# Altium PCB PCB4.PcbDoc
Units mm, origin at the board's own origin, x right, y up, seen from the top; angles counter-clockwise.
Board outline 34.74 x 43.48 mm, 4 copper layers (Top Layer, GND, VCC, Bottom Layer), stack 0.778 mm thick; 52 components, 28 nets, 188 pads, 57 vias.
Unrouted connection lines stored in the file: 2.
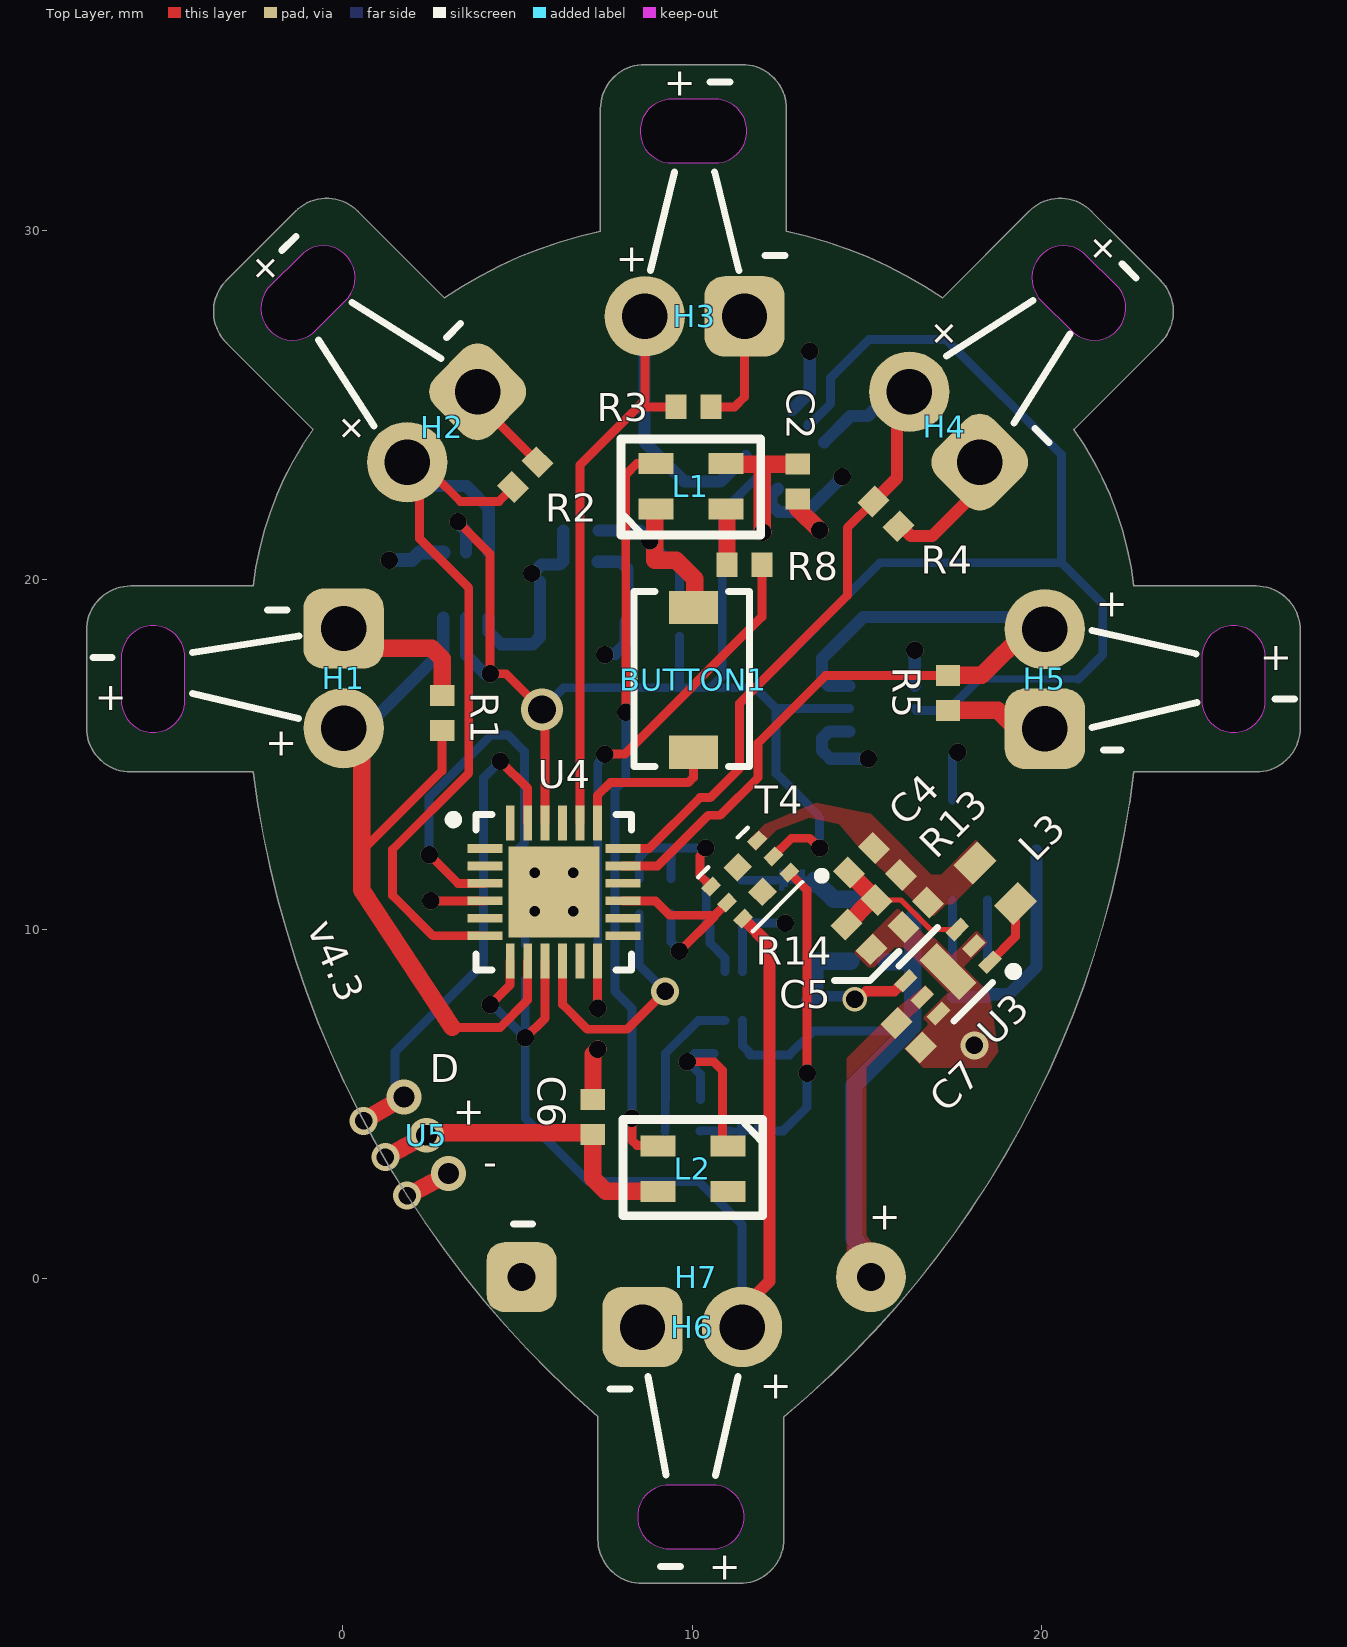
[diagram p0: Top Layer view]
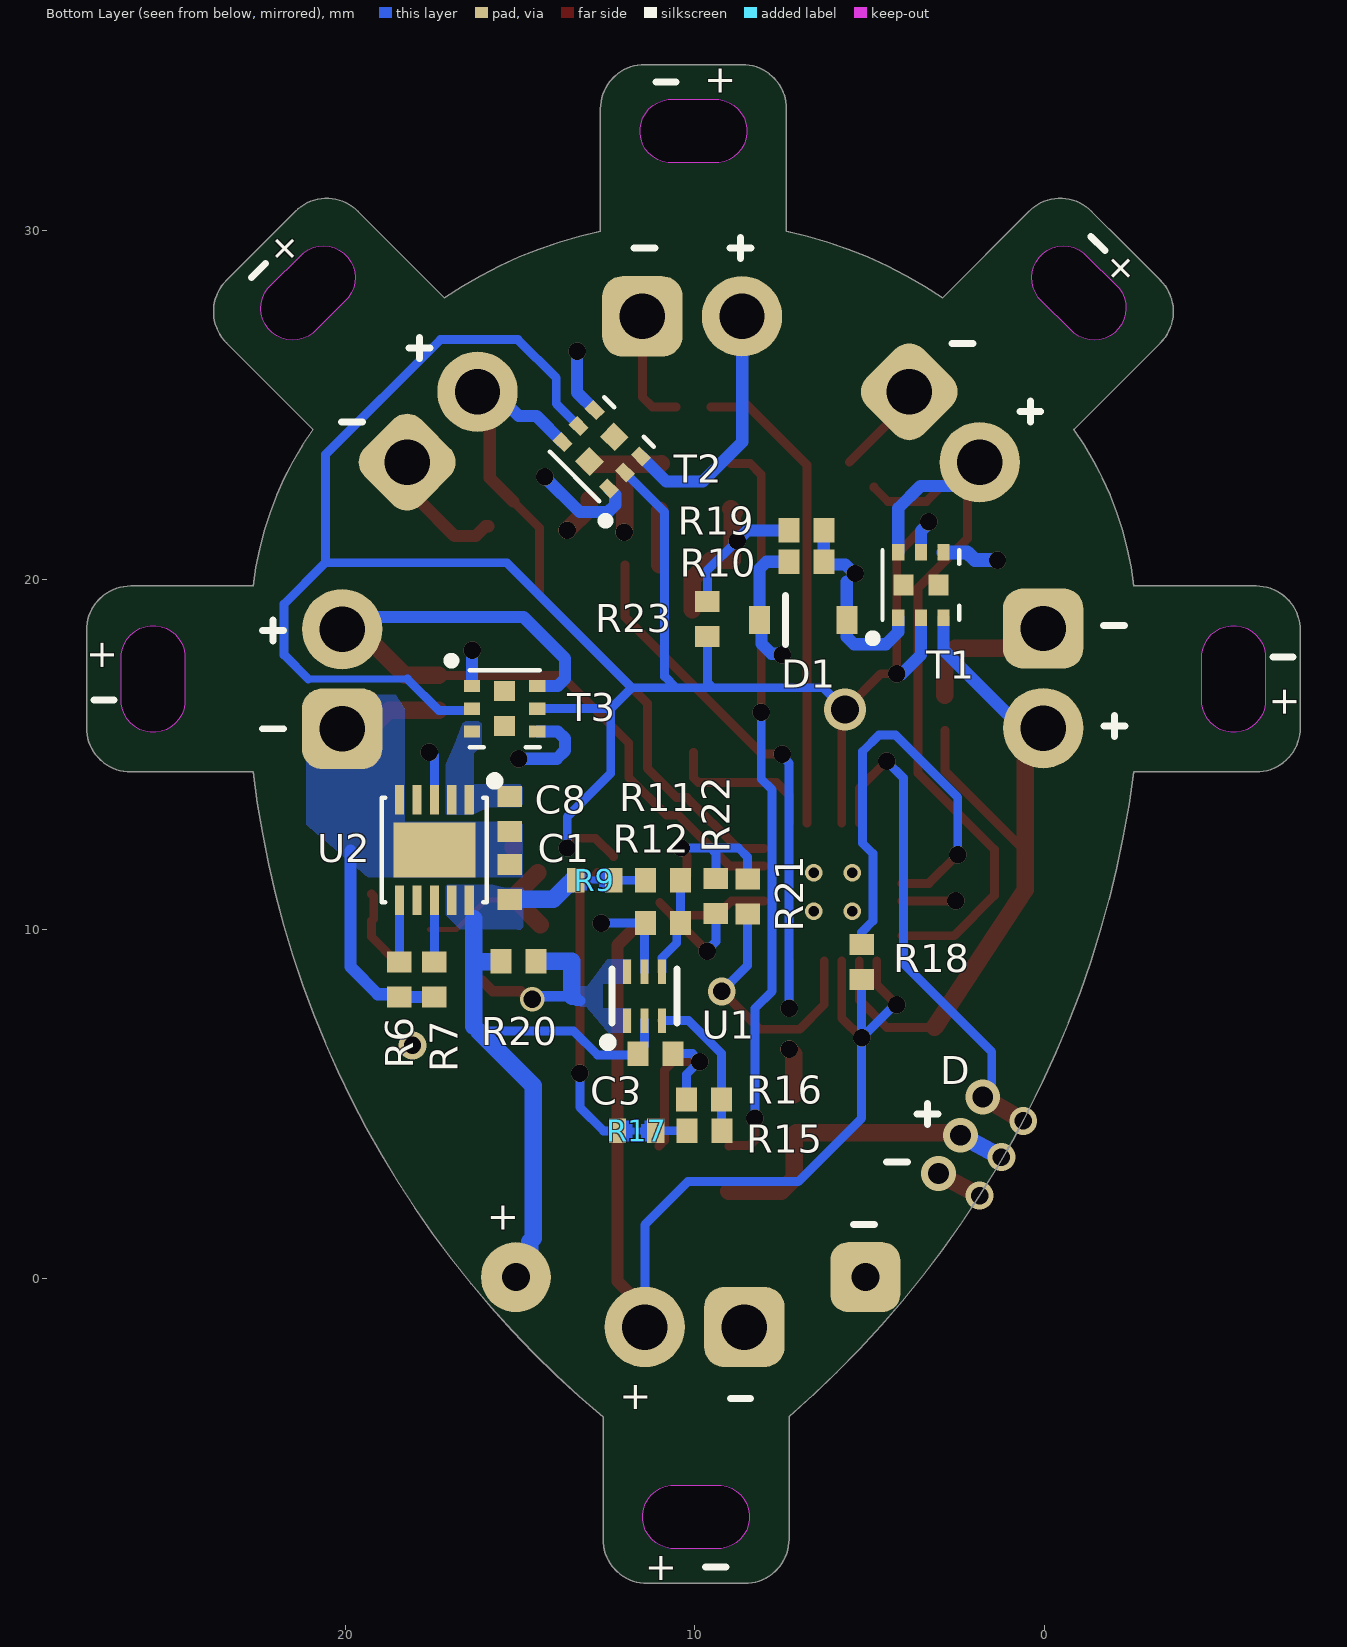
[diagram p1: Bottom Layer view, seen from below]
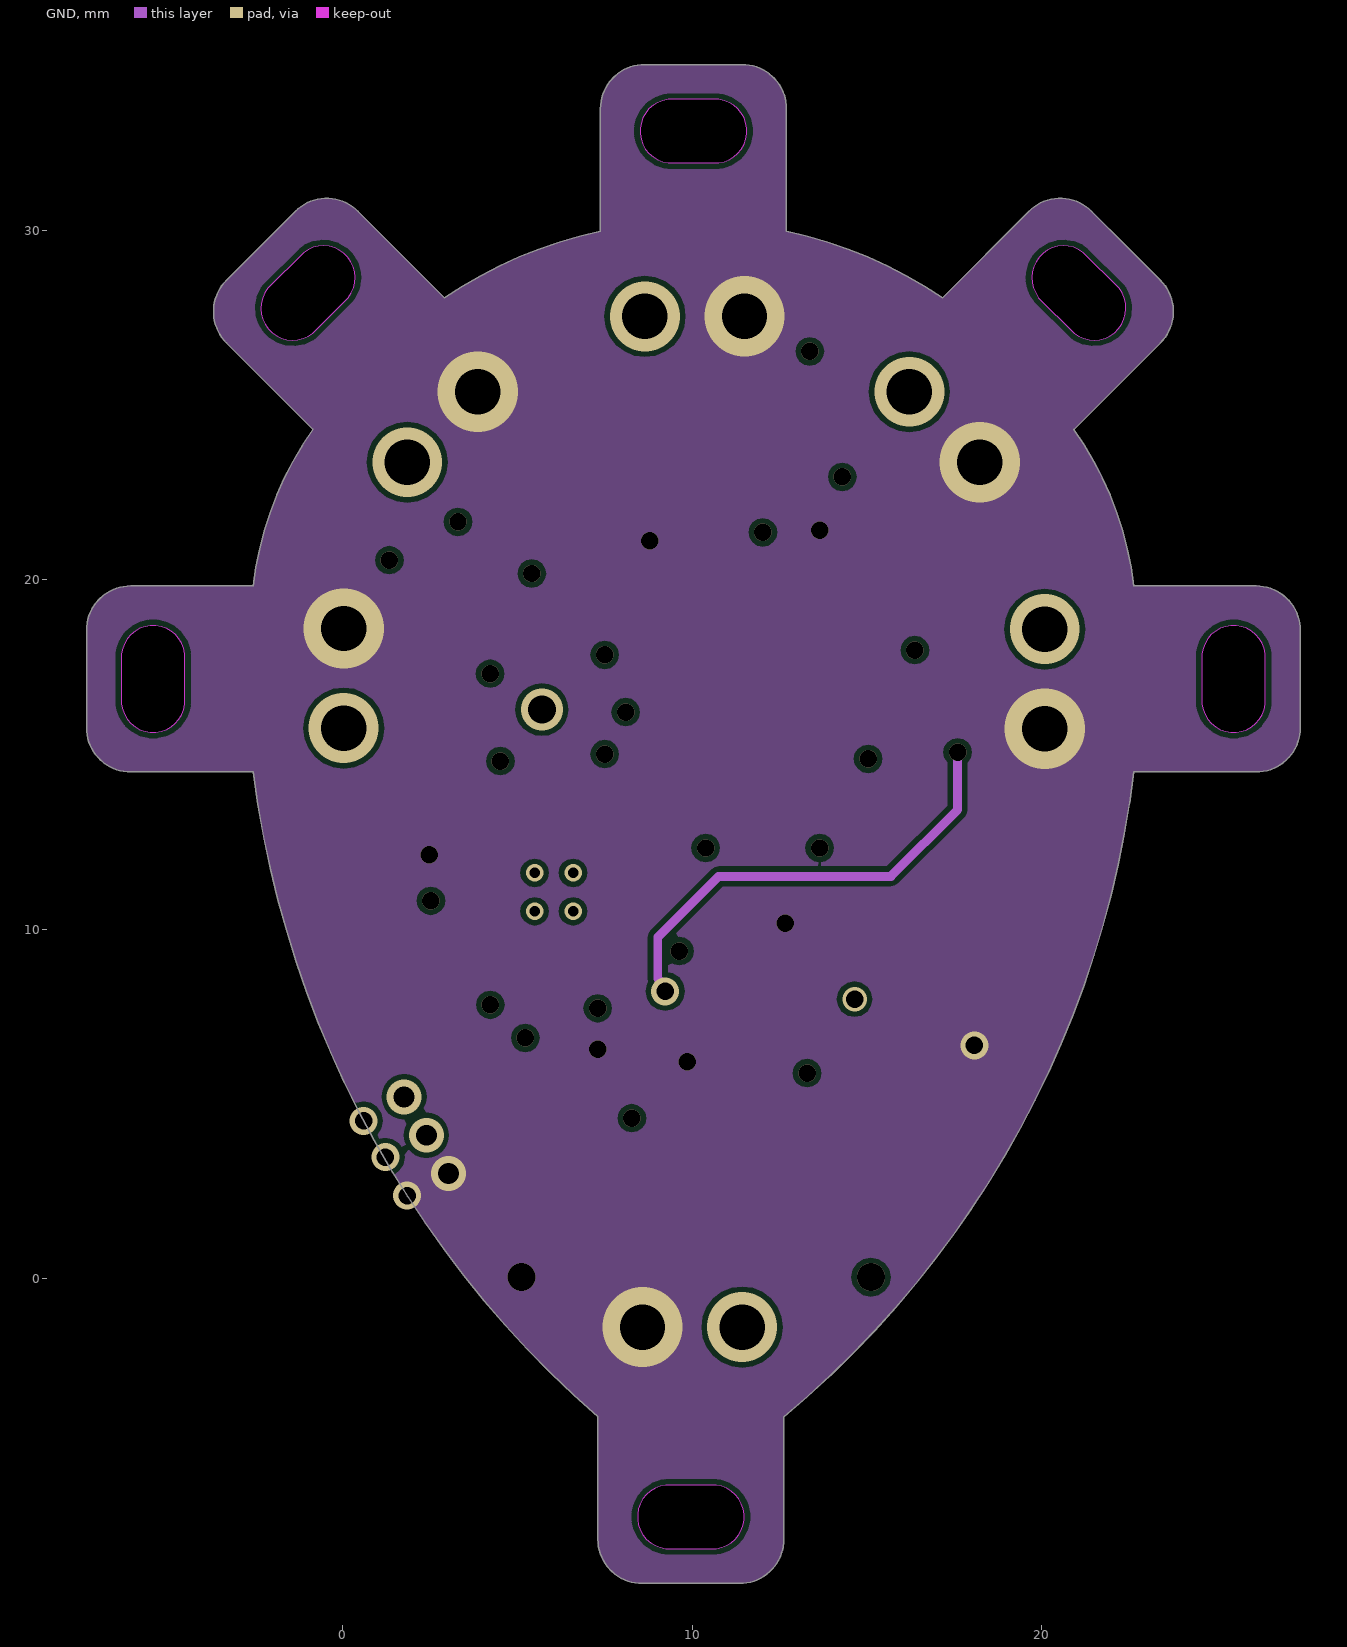
[diagram p2: GND]
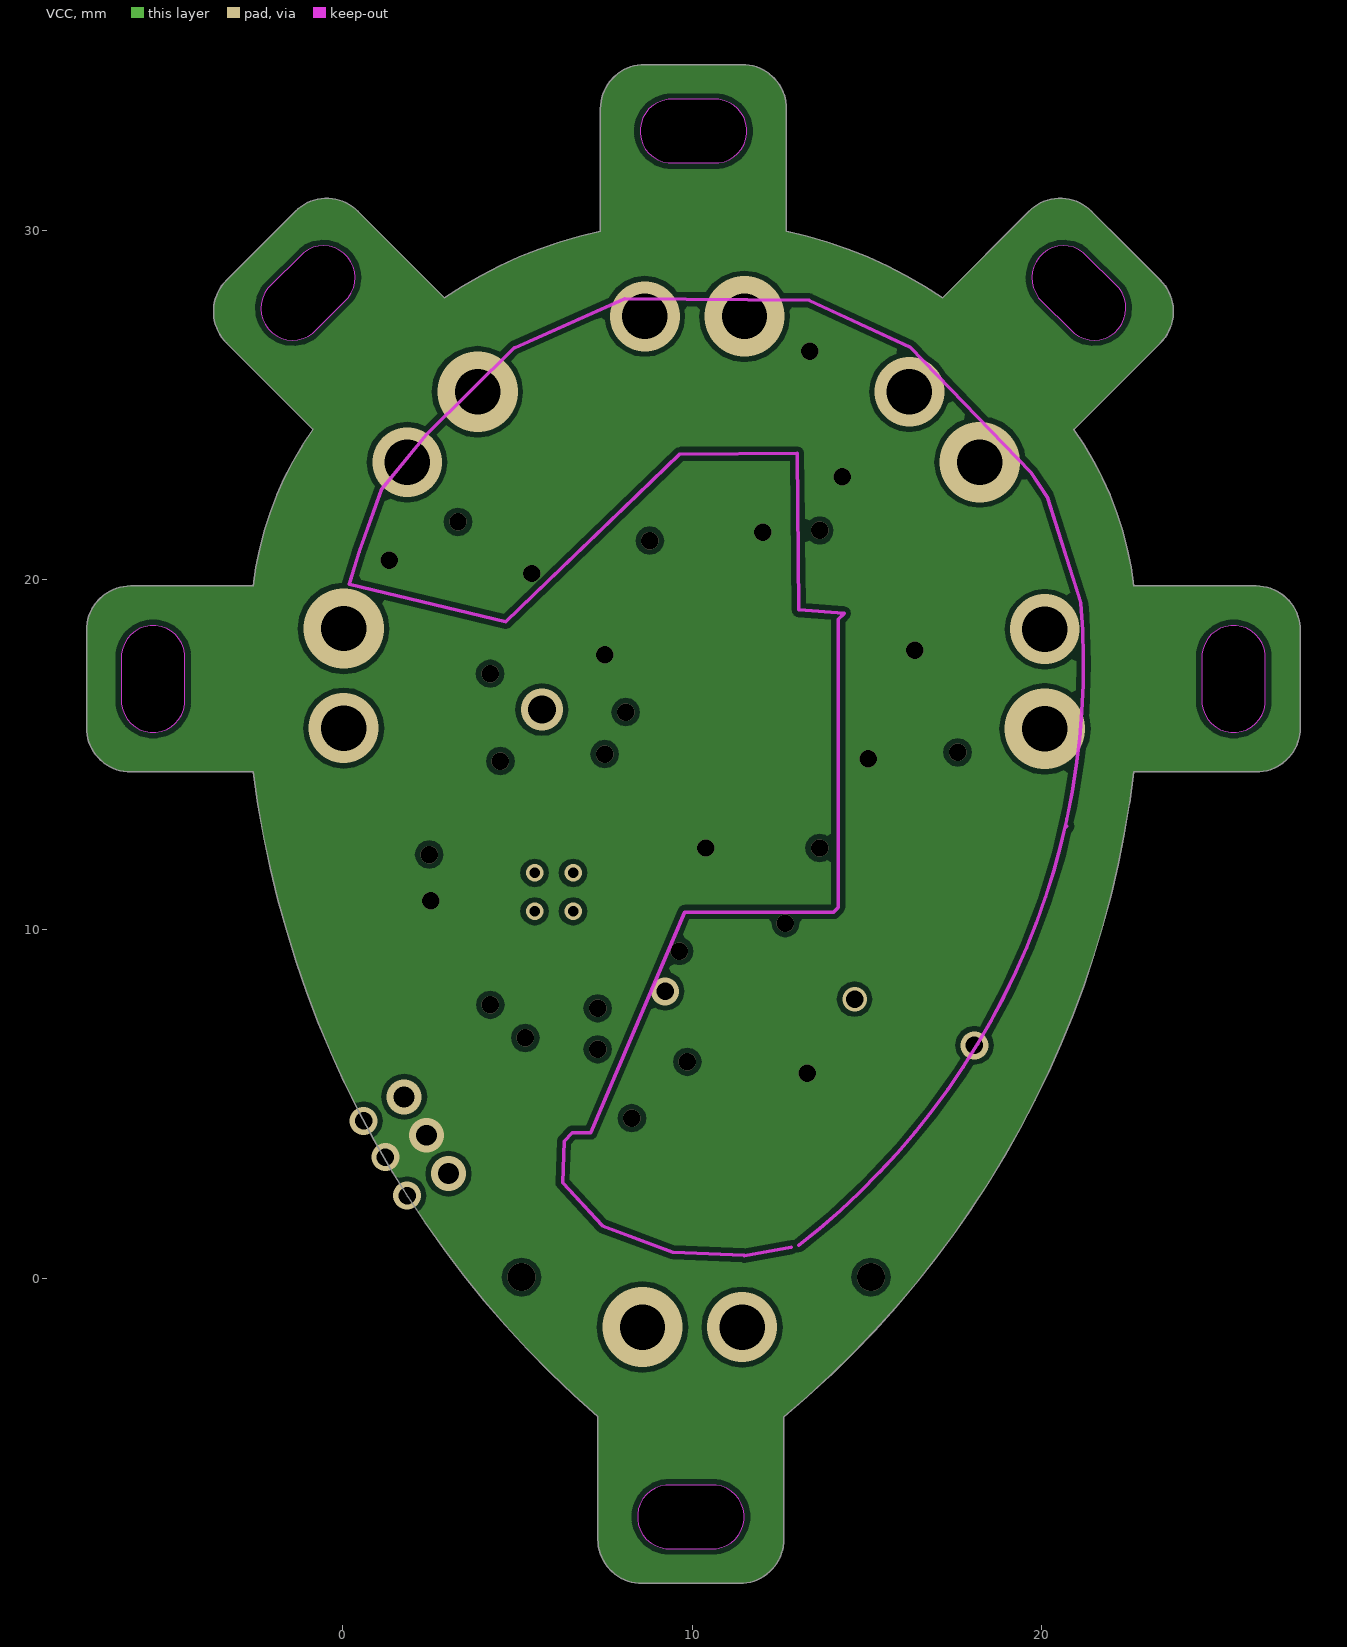
[diagram p3: VCC]
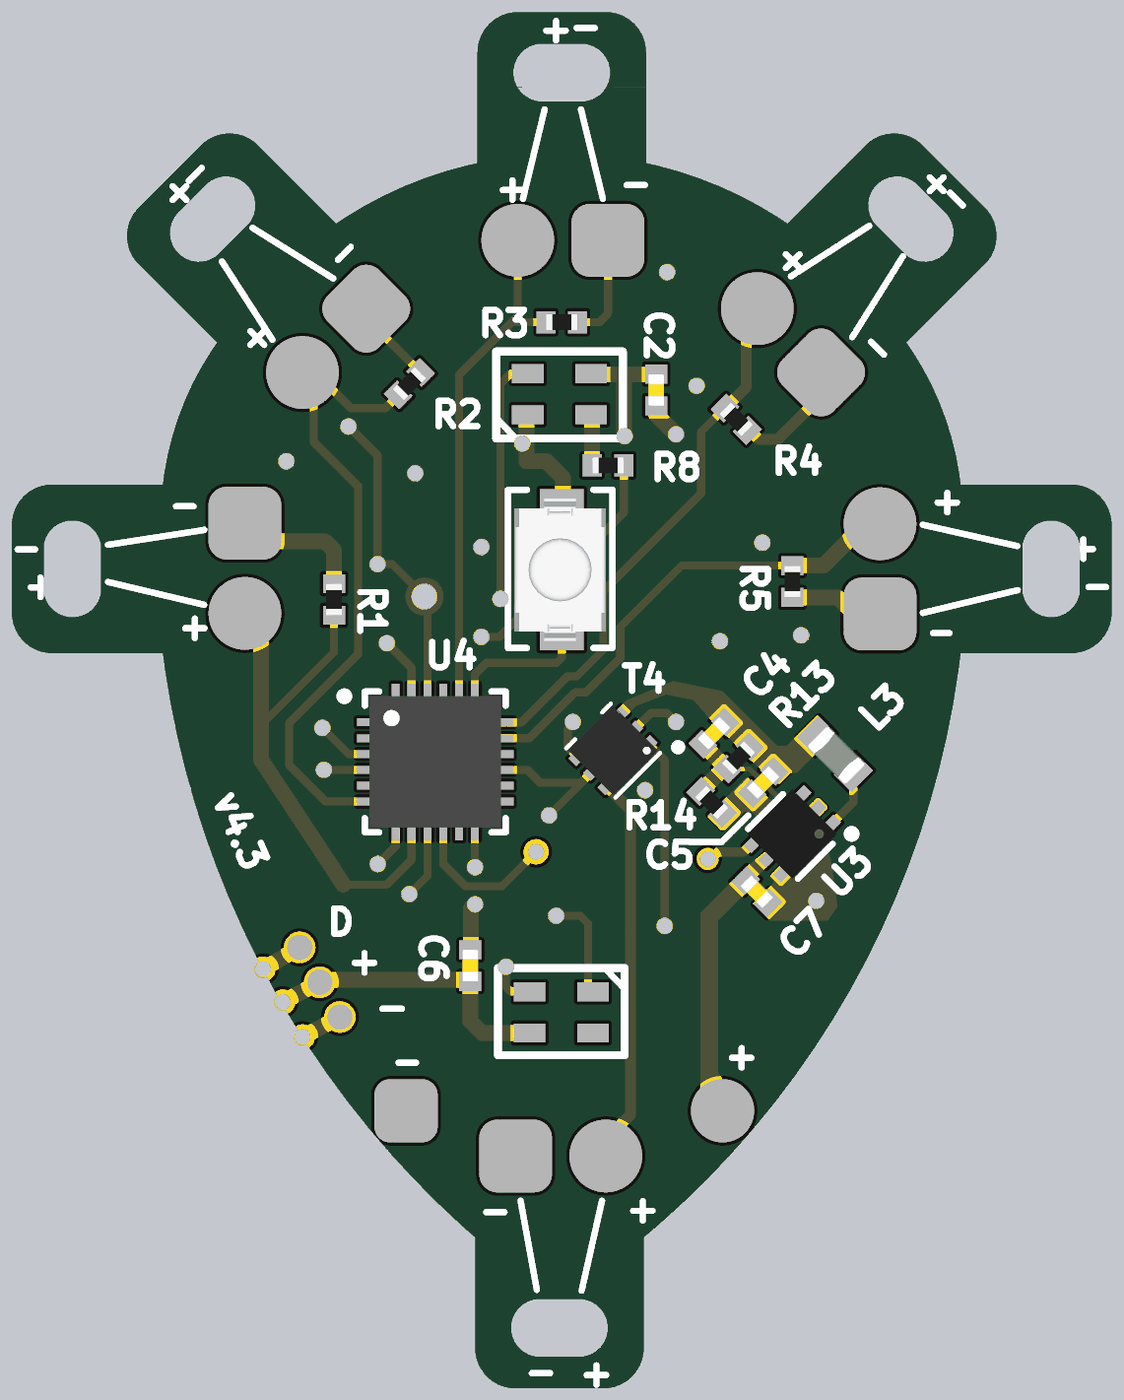
[diagram p4: 3D render of the assembled board from above, using the file's embedded part models]
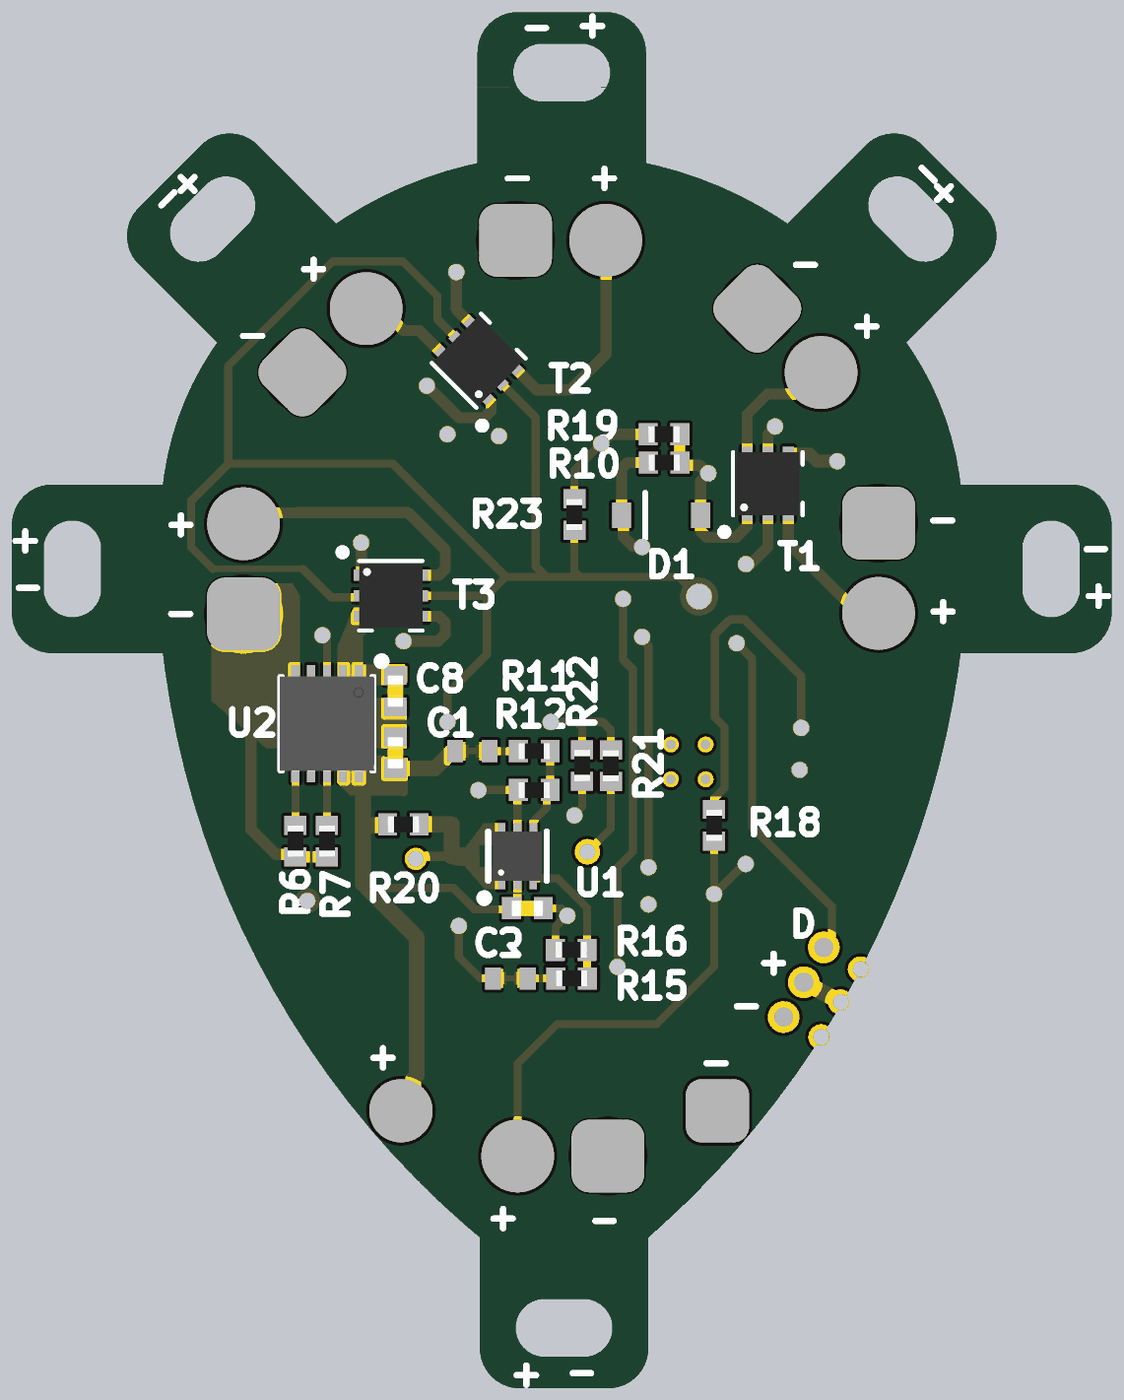
[diagram p5: 3D render of the assembled board from below, using the file's embedded part models]

## Layer stack, top to bottom
Top Solder: solder mask 0.0102, Solder Resist, Dk 3.5
Top Layer: signal copper 0.0356
Dielectric 1: core 0.254, FR-4, Dk 4.2
GND: signal copper 0.036
Dielectric 3: prepreg 0.127, Dk 4.2
VCC: signal copper 0.036
Dielectric 2: core 0.254, Dk 4.2
Bottom Layer: signal copper 0.0356
Bottom Solder: solder mask 0.0102, Solder Resist, Dk 3.5

## Board outline
-6.061,14.502 cw(c-6.061,15.772) -7.331,15.772 -7.331,17.163 -7.331,18.555 cw(c-6.061,18.555) -6.061,19.825 -2.561,19.825 cw(c7.106,18.7) -0.849,24.307 -3.324,26.782 cw(c-2.426,27.68) -3.324,28.578 -2.339,29.562 -1.355,30.546 cw(c-0.457,29.648) 0.441,30.546 2.916,28.071 cw(c10.009,17.658) 7.379,29.98 7.379,33.48 cw(c8.649,33.48) 8.649,34.75 11.432,34.75 cw(c11.432,33.48) 12.702,33.48 12.702,29.98 cw(c10.073,17.658) 17.166,28.071 19.641,30.546 cw(c20.539,29.648) 21.437,30.546 22.421,29.562 23.405,28.578 cw(c22.507,27.68) 23.405,26.782 20.93,24.307 cw(c12.976,18.7) 22.643,19.825 22.642,19.825 26.142,19.825 cw(c26.142,18.555) 27.412,18.555 27.412,17.163 27.412,15.772 cw(c26.142,15.772) 26.142,14.502 22.642,14.502 cw(c-5.579,17.866) 12.629,-3.956 12.629,-7.456 cw(c11.359,-7.456) 11.359,-8.726 9.967,-8.726 8.576,-8.726 cw(c8.576,-7.456) 7.306,-7.456 7.306,-3.956 cw(c26.693,18.273) -2.561,14.502
cut-out: 20.941,27.058 ccw(c21.506,27.778) 22.227,28.342 21.201,29.368 ccw(c20.637,28.647) 19.917,28.082
cut-out: 0.165,28.082 ccw(c-0.555,28.647) -1.119,29.368 -2.146,28.342 ccw(c-1.425,27.778) -0.859,27.058
cut-out: 10.691,-7.726 ccw(c10.582,-6.817) 10.693,-5.908 9.241,-5.908 ccw(c9.352,-6.817) 9.243,-7.726
cut-out: 26.412,17.887 ccw(c25.503,17.778) 24.595,17.889 24.595,16.437 ccw(c25.503,16.548) 26.412,16.44
cut-out: 9.317,33.75 ccw(c9.426,32.841) 9.315,31.933 10.767,31.933 ccw(c10.656,32.841) 10.765,33.75
cut-out: -6.331,16.44 ccw(c-5.422,16.548) -4.513,16.437 -4.513,17.889 ccw(c-5.422,17.778) -6.331,17.887
cut-out: 19.993,29.29
cut-out: -2.067,27.134
cut-out: 8.442,-6.818
cut-out: 25.504,15.639
cut-out: 11.566,32.842
cut-out: -5.423,18.688

## Design rules (kind name [scope] priority, off if disabled: settings)
Clearance "merge with traces" [InNamedPolygon('Bottom Layer-AX1')] p1: gap=0.15 ignorepadtopadclearanceinfootprint=TRUE
Clearance [All] p2: gap=0.15 ignorepadtopadclearanceinfootprint=FALSE
HoleSize [All] p1: absolutevalues=TRUE maxlimit=6 minlimit=0.2 maxpercent=80.000 minpercent=20.000
PolygonConnect [All] p1: connectstyle=Direct reliefconductorwidth=0.254 reliefentries=4 polygonreliefangle="90 Angle" airgapwidth=0.254
RoutingVias [All] p1: holewidth=0.711 width=1.27 viastyle="Through Hole" minholewidth=0.711 minwidth=1.27 maxholewidth=0.711 maxwidth=1.27
SolderMaskExpansion [All] p1: expansion=0.102 istentingtop=FALSE
Width [All] p1: maxlimit=1 minlimit=0.15 preferedwidth=0.5 minimp=50.000000 maximp=50.000000 favimp=50.000000
29 further rules are at their usual default settings.

## Components (designator, comment, footprint, x,y, rotation, side; value= is the part's Value field where it differs from the comment)
BUTTON1 "SWITCH_2PIN" "SWITCH- TL1015AF160QG" 10.041,17.138 r90 top
C1 "10uF 0402 Cap" "0402 CAP" 15.299,11.356 r270 bottom
C2 "10uF 0402 Cap" "0402 CAP" 13.027,22.813 r270 top
C3 "100nF 0402 Cap" "0402 CAP" 11.128,6.439 r180 bottom
C4 "33pF 0402" "0402 CAP" 14.851,11.972 r225 top
C5 "10uF 0402 Cap" "0402 CAP" 16.407,10.416 r225 top
C6 "10uF 0402 Cap" "0402 CAP" 7.152,4.63 r90 top
C7 "4.7uF 0402" "0402 CAP" 16.206,6.963 r315 top
C8 "10uF 0402 Cap" "0402 Cap" 15.3,13.301 r270 bottom
D1 "BAT60BE6327HTSA1" BAT60BE6327HTSA1 6.902,18.853 r0 bottom
H1 "Magnetci con. 2 pin" "MAGNETIC CON. 2 PIN" 0.029,15.757 r90 top
H2 "Magnetci con. 2 pin" "MAGNETIC CON. 2 PIN" 1.848,23.367 r45 top
H3 "Magnetci con. 2 pin" "MAGNETIC CON. 2 PIN" 8.652,27.542 r0 top
H4 "Magnetci con. 2 pin" "MAGNETIC CON. 2 PIN" 16.221,25.385 r315 top
H5 "Magnetci con. 2 pin" "MAGNETIC CON. 2 PIN" 20.097,18.588 r270 top
H6 "Magnetci con. 2 pin" "MAGNETIC CON. 2 PIN" 11.433,-1.386 r180 top
H7 "2 pin" 2_PIN 10.121,0.042 r0 top
L1 "LED_SK6805_2427" LED_SK6805_2427 10.969,22.031 r180 top
L2 "LED_SK6805_2427" LED_SK6805_2427 9.025,3.8 r0 top
L3 "2.2uH 0604" "0603 INDUCTOR" 18.677,11.313 r135 top
R1 "10K 0402" "0402 RES" 2.845,16.195 r90 top
R2 "10K 0402" "0402 RES" 5.227,23.014 r45 top
R3 "10K 0402" "0402 RES" 10.041,24.953 r0 top
R4 "10K 0402" "0402 RES" 15.552,21.888 r315 top
R5 "10K 0402" "0402 RES" 17.327,16.763 r270 top
R6 "10K 0402" "0402 RES" 18.458,8.563 r270 bottom
R7 "10K 0402" "0402 RES" 17.458,8.563 r270 bottom
R8 "1K 0402" "0402 RES" 11.502,20.431 r180 top
R9 "0402 Connected Pad" "0402 CONNECTED PAD" 12.865,11.404 r180 bottom
R10 "10K 0402" "0402 Res" 6.802,20.521 r0 bottom
R11 "2M 0402" "0402 RES" 10.909,11.404 r180 bottom
R12 "274K 0402" "0402 RES" 10.909,10.179 r180 bottom
R13 "820k 0402" "0402 RES" 15.629,11.194 r225 top
R14 "180k 0402" "0402 RES" 14.78,9.78 r315 top
R15 "2M 0402" "0402 RES" 9.728,4.226 r180 bottom
R16 "187K 0402" "0402 RES" 9.74,5.127 r0 bottom
R17 "0402 Connected Pad" "0402 CONNECTED PAD" 11.664,4.226 r0 bottom
R18 "10K 0402" "0402 RES" 5.227,9.063 r90 bottom
R19 "10K 0402" "0402 Res" 6.81,21.415 r0 bottom
R20 "2M 0402" "0402 Res" 15.043,9.09 r180 bottom
R21 "10K 0402" "0402 Res" 8.489,10.942 r90 bottom
R22 "2M 0402" "0402 Res" 9.4,10.951 r270 bottom
R23 "10K 0402" "0402 Res" 9.641,18.879 r90 bottom
T1 "NTLUD3A50PZTAG" NTLUD3A50PZTAG 3.53,19.853 r90 bottom
T2 "NTLUD3A50PZTAG" NTLUD3A50PZTAG 12.664,23.739 r45 bottom
T3 "NTLUD3A50PZTAG" NTLUD3A50PZTAG 15.443,16.313 r180 bottom
T4 "NTLUD3A50PZTAG" NTLUD3A50PZTAG 11.666,11.423 r225 top
U1 "TPS3700DSER" TPS3700DSER 11.44,8.087 r90 bottom
U2 "MCP73833T-AMI/MF" MCP73833T-AMI/MF 17.458,12.269 r270 bottom
U3 "TPS62240DRVTG4" TPS62240DRVR 17.326,8.79 r225 top
U4 "ATTINY1617-MN" ATTINY1617_QFN50P400X400X90_HS-25M 6.045,11.063 r0 top
U5 "1.27mm 3pin header" "1.27MM 3PIN HEADER" 1.76,5.204 r300 top

## Footprints (in the part's own frame and the unit in brackets; to place one, negate y for a bottom-side part, rotate by r counter-clockwise, add the part's x,y. Pads: shape width x height; smd on the part's side, far side on the other; paste and mask are expansions set on the pad)
"1.27MM 3PIN HEADER" [mm]
  round 0.8 smd: 1(0,0) 2(1.27,0) 3(2.54,0)
2_PIN [mm]
  rrect50% 2x2 smd: 1(-5,0)
  rrect50% 2x2 smd far side: 1(-5,0)
  round 2 smd: 2(5,0)
  round 2 smd far side: 2(5,0)
"0402 CAP" [mm]
  rect 0.6x0.7 smd: 1(-0.5,0) 2(0.5,0)
  body extent -0.5,-0.25 0.5,0.25, height 0.5
"0402 Cap" [mm]
  rect 0.6x0.7 smd: 1(-0.5,0) 2(0.5,0)
  body extent -0.5,-0.25 0.5,0.25, height 0.5
"0402 CONNECTED PAD" [mm]
  rect 0.5x0.7 smd: 1(-0.55,0) 2(0.55,0)
  Top Layer region: -0.275,0.2 -0.125,0.2 -0.125,-0.2 -0.275,-0.2
  Top Layer region: 0.125,0.2 0.275,0.2 0.275,-0.2 0.125,-0.2
  Top Layer region: -0.375,0.3 -0.225,0.3 -0.225,-0.3 -0.375,-0.3
  Top Layer region: 0.225,0.3 0.375,0.3 0.375,-0.3 0.225,-0.3
  Top Layer lines w0.2: 0.55,0 -0.55,0
"0402 RES" [mm]
  rect 0.6x0.7 smd: 1(-0.5,0) 2(0.5,0)
  body extent -0.5,-0.25 0.5,0.25, height 0.3
"0402 Res" [mm]
  rect 0.6x0.7 smd: 1(-0.5,0) 2(0.5,0)
  body extent -0.5,-0.25 0.5,0.25, height 0.3
"0603 INDUCTOR" [mil]
  rect 31x38 smd: 1(-32.23,0) 2(32.23,0)
  body extent -37,-19 32,19, height 37
ATTINY1617_QFN50P400X400X90_HS-25M [mm]
  rect 1x0.25 smd: 1(-1.975,1.25) 2(-1.975,0.75) 3(-1.975,0.25) 4(-1.975,-0.25) 5(-1.975,-0.75) 6(-1.975,-1.25) 13(1.975,-1.25) 14(1.975,-0.75) 15(1.975,-0.25) 16(1.975,0.25) 17(1.975,0.75) 18(1.975,1.25)
  rect 0.25x1 smd: 7(-1.25,-1.975) 8(-0.75,-1.975) 9(-0.25,-1.975) 10(0.25,-1.975) 11(0.75,-1.975) 12(1.25,-1.975) 19(1.25,1.975) 20(0.75,1.975) 21(0.25,1.975) 22(-0.25,1.975) 23(-0.75,1.975) 24(-1.25,1.975)
  rect 2.6x2.6 smd: 25(0,0)
  silkscreen extent -3,-2.22 2.22,2.22, body extent -2.08,-2.08 2.08,2.08, height 0.9
BAT60BE6327HTSA1 [mm]
  rect 0.6x0.8 smd: A(-1.25,0) K(1.25,0)
  silkscreen extent 0.5,-0.7 0.5,0.7
LED_SK6805_2427 [mm]
  rect 1x0.6 smd: DIN(0,0) DOUT(2,-1.3) VDD(0,-1.3) VSS(2,0)
  silkscreen extent -1,-2 3,0.75, body extent -0.36,-1.84 2.36,0.57, height 1
"MAGNETIC CON. 2 PIN" [mm]
  round 2.3 smd: 1(0,0)
  round 2.3 smd far side: 1(0,0)
  rrect50% 2.3x2.3 smd: 2(2.85,0)
  rrect50% 2.3x2.3 smd far side mask+0.05: 2(2.85,0)
MCP73833T-AMI/MF [mm]
  rect 0.84x0.26 smd: 1(-1.435,1) 2(-1.435,0.5) 3(-1.435,0) 4(-1.435,-0.5) 5(-1.435,-1) 6(1.435,-1) 7(1.435,-0.5) 8(1.435,0) 9(1.435,0.5) 10(1.435,1)
  rect 1.58x2.35 smd: 11(0,0)
  silkscreen extent -2.02,-1.5 1.5,1.77, body extent -1.5,-1.5 1.5,1.5, height 0.8
NTLUD3A50PZTAG [mm]
  rect 0.47x0.35 smd: 1(-0.935,0.65) 2(-0.935,0) 3(-0.935,-0.65) 4(0.935,-0.65) 5(0.935,0) 6(0.935,0.65)
  rect 0.6x0.57 smd: 7(0,0.5) 8(0,-0.5)
  silkscreen extent -1.55,-1.1 1,1.4, body extent -1,-1 1,1, height 0.6
"SWITCH- TL1015AF160QG" [mm]
  rect 0.95x1.4 smd: 1(-2.075,0) 2(2.075,0)
  silkscreen extent -2.47,-1.6 2.53,1.7, body extent -2.26,-1.4 2.24,1.5, height 2.05
TPS3700DSER [mm] "PSON, 6-Leads, Body 1.50x1.50mm, Pitch 0.50mm, IPC Medium Density"
  rect 0.7x0.23 smd: 1(-0.7,0.5) 2(-0.7,0) 3(-0.7,-0.5) 4(0.7,-0.5) 5(0.7,0) 6(0.7,0.5)
  silkscreen extent -1.37,-0.93 0.77,1.1, body extent -0.78,-0.77 0.78,0.77, height 0.8
TPS62240DRVR [mil]
  rect 24x14 smd: 1(-41,26) 2(-41,0) 3(-41,-26) 4(41,-26) 5(41,0) 6(41,26)
  rect 27.56x63 smd: 7(0,0)
  silkscreen extent -54,-43 34,54, body extent -39,-39 39,39, height 30

## Part data
BUTTON1: Supplier Part Number 1=2292962, Supplier 1=Farnell, Supplier 2=Digi-Key, Supplier Part Number 2=EG4344CT-ND
C1 C2 C5 C6 C8: Supplier Part Number 1=490-13238-1-ND, Supplier 1=Digi-Key, Supplier 2=Farnell, Supplier Part Number 2=2218854
C3: Supplier Part Number 1=490-6287-1-ND, Supplier 1=Digi-Key
C4: Supplier Part Number 1=2940852, Supplier 1=Farnell, Supplier 2=Digi-Key, Supplier Part Number 2=399-13709-1-ND
C7: Supplier Part Number 1=490-14306-1-ND, Supplier 1=Digi-Key, Supplier 2=Farnell, Supplier Part Number 2=2688503
D1: "Diode Schottky 10V 3A Automotive 2-Pin SOD-323 T/R", Average Rectified Current=3A, Case/Package=SOD-323-2, Forward Voltage=600mV, Manufacturer=Infineon, Max Operating Temperature=125°C, Max Repetitive Reverse Voltage (Vrrm)=10V, Min Operating Temperature=-55°C, Peak Non-Repetitive Surge Current=5A, Supplier Part Number 1=2443539, ComponentLink1Description=http://www.infineon.com/dgdl/bat60bseries.pdf?folderId=db3a304313d846880113def5812204a1&fileId=db3a304314dca3890115195908c50f0b&src-supplier=Avnet, ComponentLink1URL=http://www.infineon.com/dgdl/bat60bseries.pdf?folderId=db3a304313d846880113def5812204a1&fileId=db3a304314dca3890115195908c50f0b&src-supplier=Avnet, ComponentLink2Description=https://www.verical.com/server-webapp/html/getDatasheet?partID=747527&src-supplier=Verical, ComponentLink2URL=https://www.verical.com/server-webapp/html/getDatasheet?partID=747527&src-supplier=Verical, Current Rating=3A, Element Configuration=Single, Forward Current=3A, Halogen Free="Not Halogen Free", Lead Free="Lead Free", Manufacturer Part Number=BAT60BE6327HTSA1, Max Reverse Voltage (DC)=10V, Mount="Surface Mount", Number of Pins=2, Output Current=3A, Packaging="Tape and Reel", Polarity=Standard, Radiation Hardening=No, Stock 1=14662, Supplier 1=Farnell, Supplier 2=Digi-Key, Supplier Part Number 2=BAT60BE6327HTSA1CT-ND, Voltage Rating (DC)=10V
L1 L2: Supplier Part Number 1=1528-2291-ND, Supplier 1=Digi-Key
L3: Supplier Part Number 1=2215629, Supplier 1=Farnell, Supplier 2=Digi-Key, Supplier Part Number 2=445-6385-1-ND
R1 R2 R3 R4 R5 R6 R7 R10 R18 R19 R21 R23: Supplier Part Number 1=MCS0402-10.0K-CFCT-ND, Supplier 1=Digi-Key, Supplier 2=Farnell, Supplier Part Number 2=2614406
R8: Supplier Part Number 1=2614405, Supplier 1=Farnell, Supplier 2=Digi-Key, Supplier Part Number 2=MCS0402-1.00K-CFCT-ND
R11 R15: "RES SMD 2M OHM 1% 1/16W 0402", Case/Package=0402, Case Code (Metric)=1005, Manufacturer="Vishay Dale", Manufacturer Part Number=CRCW04021M00DHEDP, Max Operating Temperature=155°C, Max Power Dissipation=63mW, Min Operating Temperature=-55°C, Package Quantity=10000, Resistance=1MR, Supplier Part Number 1=541-4066-6-ND, Temperature Coefficient=50ppm/°C, Tolerance=0.5%, Case Code (Imperial)=0402, ComponentLink1Description=http://www.vishay.com/docs/20036/dcrcwpe3.pdf?src-supplier=Digi-Key, ComponentLink1URL=http://www.vishay.com/docs/20036/dcrcwpe3.pdf?src-supplier=Digi-Key, Composition="Thick Film", Depth=0.5mm, Features="Automotive AEC-Q200", Height=0.016inch, Lead Free="Lead Free", Length=0.039inch, Military Standard=Not, Number of Terminations=2, Packaging="Tape and Reel", Supplier 1=Digi-Key, Width=0.02inch
R12: Supplier Part Number 1=P27.4KLDKR-ND, Supplier 1=Digi-Key
R13: Supplier Part Number 1=9239570, Supplier 1=Farnell, Supplier 2=Digi-Key, Supplier Part Number 2=YAG3240CT-ND
R14: Supplier Part Number 1=2330492, Supplier 1=Farnell, Supplier 2=Digi-Key, Supplier Part Number 2=A103794CT-ND
R16: Supplier Part Number 1=P187KLDKR-ND, Supplier 1=Digi-Key
R20 R22: "RES SMD 2M OHM 1% 1/16W 0402", Case Code (Imperial)=0402, Case Code (Metric)=1005, Manufacturer="Vishay Dale", Manufacturer Part Number=CRCW04021M00DHEDP, Max Operating Temperature=155°C, Max Power Dissipation=63mW, Min Operating Temperature=-55°C, Package Quantity=10000, Resistance=1MR, Supplier Part Number 1=541-4066-6-ND, Temperature Coefficient=50ppm/°C, Tolerance=0.5%, Case/Package=0402, ComponentLink1Description=http://www.vishay.com/docs/20036/dcrcwpe3.pdf?src-supplier=Digi-Key, ComponentLink1URL=http://www.vishay.com/docs/20036/dcrcwpe3.pdf?src-supplier=Digi-Key, Composition="Thick Film", Depth=0.5mm, Features="Automotive AEC-Q200", Height=0.016inch, Lead Free="Lead Free", Length=0.039inch, Military Standard=Not, Number of Terminations=2, Packaging="Tape and Reel", Supplier 1=Digi-Key, Width=0.02inch
T1 T2 T3 T4: Supplier Part Number 1=NTLUD3A50PZTAGOSCT-ND, Supplier 1=Digi-Key, Supplier 2=Farnell, Supplier Part Number 2=2724458
U1: "IC COMPARATOR WINDOW", Case/Package=WFDFN, Input Bias Current=25nA, Manufacturer="Texas Instruments", Max Operating Temperature=125°C, Max Supply Current=13uA, Max Supply Voltage=18V, Min Operating Temperature=-40°C, Min Supply Voltage=1.8V, Package Quantity=3000, Supplier Part Number 1=296-40742-1-ND, ComponentLink1Description=http://www.ti.com/lit/gpn/tps3700?src-supplier=Mouser, ComponentLink1URL=http://www.ti.com/lit/gpn/tps3700?src-supplier=Mouser, ComponentLink2Description=http://www.ti.com/lit/ds/symlink/tps3700.pdf?src-supplier=Digi-Key, ComponentLink2URL=http://www.ti.com/lit/ds/symlink/tps3700.pdf?src-supplier=Digi-Key, ComponentLink3Description=http://www.ti.com/lit/ds/symlink/tps3700.pdf?src-supplier=Avnet, ComponentLink3URL=http://www.ti.com/lit/ds/symlink/tps3700.pdf?src-supplier=Avnet, Hysteresis=5.5mV, Lead Free="Lead Free", Manufacturer Part Number=TPS3700DSER, Mount="Surface Mount", Number of Channels=1, Number of Elements=1, Number of Pins=6, Packaging="Tape and Reel", Pricing 1="1=1.84, 10=1.657, 100=1.3317, 500=1.09412, 1000=0.90655 (USD)", Propagation Delay=29us, Quiescent Current=13uA, Radiation Hardening=No, Stock 1=11662, Supplier 1=Digi-Key, Supplier 2=Farnell, Supplier Part Number 2=3005631, Turn-On Delay Time=29us
U2: "Linear Charge Management Controller Li-Ion/Li-Pol 1mA 4.2V/4.35V/4.4V/4.5V 10-Pin DFN EP T/R", Package="MSOP-10 Microchip", Supplier Part Number 1=MCP73833T-AMI/MFCT-ND, Availability=Unavailable, MF=Microchip, MP=MCP73833-AMI/UN, Price=None, SnapEDA_Link=https://www.snapeda.com/parts/MCP73833-AMI/UN/Microchip/view-part/?ref=snap, Supplier 1=Digi-Key
U3: library part TPS62240DRVR, "Conv DC-DC 2V to 6V Synchronous Step Down Single-Out 0.6V to 6V 0.3A 6-Pin WSON EP T/R", Package="SON-6 Texas Instruments", Supplier Part Number 1=2769418, Availability=Unavailable, MF="Texas Instruments", MP=TPS62240DRVTG4, Price=None, SnapEDA_Link=https://www.snapeda.com/parts/TPS62240DRVTG4/Texas%20Instruments/view-part/?ref=snap, Supplier 1=Farnell, Supplier 2=Digi-Key, Supplier Part Number 2=296-27028-1-ND
U4: Supplier Part Number 1=ATTINY1617-MFRCT-ND, Supplier 1=Digi-Key

## Via types
v1: diameter 0.5, hole 0.5, Top Layer to Bottom Layer, tented both sides, 29 vias
v2: diameter 2, hole 1.3, Top Layer to Bottom Layer, 6 vias
v3: diameter 2.3, hole 1.3, Top Layer to Bottom Layer, 6 vias
v4: diameter 0.8, hole 0.5, Top Layer to Bottom Layer, 4 vias
v5: diameter 0.5, hole 0.3, Top Layer to Bottom Layer, 4 vias
v6: diameter 1, hole 0.6, Top Layer to Bottom Layer, 3 vias
v7: diameter 0.8, hole 0.8, Top Layer to Bottom Layer, 2 vias
v8: diameter 0.8, hole 0.5, Top Layer to Bottom Layer, tented both sides, 1 vias
v9: diameter 0.7, hole 0.5, Top Layer to Bottom Layer, 1 vias
v10: diameter 1.2, hole 0.8, Top Layer to Bottom Layer, 1 vias

## Nets (pads, with @x,y where several pads share a name; then routed paths per layer and width w, separated by ;. In a path a pad name is that pad's centre, name@x,y a point inside that pad or via, vN(x,y) a via of type N, cw(c..) or ccw(c..) an arc to the next point about the centre after c; other vN are vias at no path point)
AX1: H6.1 R18.1 T4.6 U4.7 U4.9 | length 32
  Top Layer w0.254: v1(4.227,7.838) 4.795,8.407 U4.7 ; v1(5.227,6.888) 5.795,7.457 U4.9
  Top Layer w0.35: v2(11.433,-1.386) 11.433,-0.859 12.214,-0.077 12.214,9.552 T4.6
  Bottom Layer w0.254: v1(4.227,7.838) 4.277,7.838 v1(5.227,6.888) ; R18.1 v1(5.227,6.888) ; v2(11.433,-1.386) 11.433,1.542 10.2,2.775 7.044,2.775 5.227,4.592 v1(5.227,6.888)
BTN: BUTTON1.1 U4.19 | length 4.5
  Top Layer w0.254: U4.19 7.295,13.832 7.659,14.195 9.892,14.195 10.041,14.344 BUTTON1.1
BUCK_EN: R20.2 U1.1 U1.6 U3.4 | length 5.2
  Top Layer w0.3: v9(14.652,7.999) 14.76,7.999 14.985,8.224 15.787,8.224 16.083,8.521 U3.4
  Bottom Layer w0.3: 13.276,7.948 13.376,7.948 13.506,8.078 14.465,8.078 14.544,7.999 v9(14.652,7.999)
  Bottom Layer w0.5: 13.506,8.078 13.517,8.09 13.517,9.09 R20.2
CH_EN: R23.1 T1.2 T1.5 T2.2 T2.5 T3.2 T3.5 T4.2 U4.22 | length 69.6
  Top Layer w0.254: v1(3.302,21.659) 4.222,20.739 v1(4.222,17.314) 4.676,17.314 v10(5.702,16.288) ; v10@5.377,16.288 v10(5.702,16.288) ; U4.22 5.795,16.195 v10(5.702,16.288) ; T4.2 12.849,12.606 13.372,12.606 v1(13.652,12.325)
  Bottom Layer w0.2: 18.227,17.163 21.065,17.163
  Bottom Layer w0.254: v10(5.702,16.288) 6.327,16.913 9.484,16.913 ; R23.1 9.641,17.071 9.484,16.913 ; T2.2 10.866,21.941 10.866,17.238 10.541,16.913 ; T2.5 T2.5@13.325,24.468 ; T2.5@13.371,24.446 13.968,25.042 13.968,25.782 15.064,26.878 17.281,26.878 20.575,23.584 20.575,20.488 ; v1(13.652,12.325) 13.652,13.215 12.406,14.461 12.406,16.313 ; T3.5 12.406,16.313 ; T3.2 16.426,16.265 16.633,16.265 16.635,16.263 17.327,16.263 18.227,17.163 ; 21.065,17.163 21.756,17.854 21.756,19.308 20.575,20.488 ; 9.484,16.913 10.541,16.913 ; 10.541,16.913 11.806,16.913 ; 11.806,16.913 12.406,16.313 ; 11.806,16.913 15.381,20.488 20.575,20.488
  Bottom Layer w0.35: v1(3.302,21.659) 3.302,21.625 3.53,21.397 T1.5 ; T1.2 3.53,17.854 4.07,17.314 v1(4.222,17.314)
CH_VDD: C8.1 T3.3 U2.1 U2.2
D1: H1.1 R1.1 T1.3 U4.8 | length 21.4
  Top Layer w0.254: 0.541,12.228 2.844,14.531 R1.1 ; 3.141,7.188 4.505,7.188 5.295,7.978 U4.8
  Top Layer w0.5: H1.1@0.455,15.563 0.541,15.478 0.541,12.228 0.541,11.13 3.141,7.188
  Bottom Layer w0.35: H1.1@0.526,15.757 0.648,15.757 2.88,17.988 T1.3
  other v2: 0.029,15.757
D2: H2.1 R2.1 T1.6 U4.6 | length 24
  Top Layer w0.254: v2(1.848,23.367) H2.1@2.202,23.014 ; U4.6 2.582,9.813 1.427,10.968 1.427,12.283 3.609,14.465 3.609,19.775 2.202,21.182 H2.1@2.202,23.014 ; R2.1 4.873,22.643 4.472,22.242 3.373,22.242 2.601,23.014 H2.1@2.202,23.014
  Bottom Layer w0.35: H2.1@2.202,23.014 2.53,22.686 3.542,22.686 4.18,22.048 T1.6
D3: H3.1 R3.1 T2.3 U4.20 | length 24.2
  Top Layer w0.254: U4.20 6.795,23.292 8.456,24.953 ; v2(8.652,27.542) 8.652,25.148 8.456,24.953 ; R3.1 8.456,24.953
  Bottom Layer w0.35: H3.1@8.652,27.042 H3.1@9.025,26.669 ; v2(8.652,27.542) 8.643,27.534 8.643,23.945 9.775,22.813 10.819,22.813 T2.3
D4: H4.1 R4.1 T2.6 U4.18 | length 20.1
  Top Layer w0.254: U4.18 8.773,12.313 10.229,13.769 10.523,13.769 11.361,14.607 11.361,16.468 14.446,19.553 14.446,21.49 R4.1
  Top Layer w0.35: R4.1 15.869,22.913 15.869,25.033 v2(16.221,25.385)
  Bottom Layer w0.35: T2.6 14.537,24.693 15.041,24.693 15.733,25.385 v2(16.221,25.385)
D5: H5.1 R5.1 T3.6 U4.17 | length 23.9
  Top Layer w0.254: U4.17 9.02,11.813 10.468,13.261 10.809,13.261 11.891,14.343 11.891,15.331 13.823,17.263 R5.1
  Top Layer w0.5: R5.1 18.297,17.263 19.622,18.588 v2(20.097,18.588)
  Bottom Layer w0.35: T3.6 13.923,16.963 13.718,17.168 13.718,17.751 14.905,18.938 18.417,18.938 18.419,18.937 19.224,18.937 19.572,18.588 v2(20.097,18.588)
GND: BUTTON1.2 C1.1 C2.2 C3.2 C5.2 C6.2 C7.2 C8.2 H1.2 H2.2 H3.2 H4.2 H5.2 H6.2 H7.1 L1.VSS L2.VSS R1.2 R2.2 R3.2 R4.2 R5.2 R6.2 R7.2 R12.1 R14.2 R16.2 R18.2 R19.2 R23.2 U1.5 U2.5 U2.11 U3.2 U3.6 U3.7 U4.3 U5.3 | length 55
  Top Layer w0.254: v1(2.477,12.138) 3.302,11.313 U4.3 ; v3(3.863,25.383) 3.863,25.085 R2.2 ; v1(9.865,6.206) 10.628,6.206 10.869,5.965 10.869,3.955 L2.VSS ; R3.2 11.22,24.953 11.502,25.234 v3(11.502,27.542)
  Top Layer w0.35: R4.2 15.99,21.535 16.271,21.253 16.876,21.253 17.884,22.262 17.884,23.018 v3(18.236,23.369)
  Top Layer w0.5: v3(0.029,18.607) 0.526,18.607 1.097,18.036 2.552,18.036 2.845,17.743 R1.2 ; v4(1.848,2.375) v6(3.03,3.004) ; C6.2@7.166,5.263 7.166,6.428 v1(7.302,6.563) ; L1.VSS 8.877,21.939 8.927,21.889 8.927,20.563 9.552,20.563 10.077,20.038 BUTTON1.2@10.077,19.138 ; C2.2 13.027,22.038 v1(13.652,21.413) ; R5.2 18.755,16.263 H5.2@19.355,15.663
  Bottom Layer w0.254: v1(2.477,12.138) 2.477,13.779 4.261,15.563 4.727,15.563 5.202,15.088 5.202,12.463 4.902,12.163 4.902,10.238 5.227,9.913 R18.2 ; v1(8.793,21.123) 9.641,20.275 R23.2 ; v1@9.844,6.18 v1@9.865,6.2 ; R16.2 10.24,5.848 9.882,6.206 v1@9.87,6.206 ; C3.2 10.071,6.439 9.967,6.336 9.967,6.303 v1@9.87,6.206 ; U1.5 11.44,10.147 R12.1 12.666,10.179 v1(12.674,10.171) ; v1@9.865,6.2 v1@9.87,6.206 ; v1@9.865,6.2 v1(9.865,6.206) v1@9.87,6.206
  Bottom Layer w0.35: R19.2@7.325,21.413 8.503,21.413 v1(8.793,21.123) ; R7.2 R6.2 18.533,8.139 19.075,8.139 19.86,8.925 19.86,12.245
  other v3: 8.583,-1.386 20.097,15.738
  other v7: 5.121,0.042
  other v8: 18.082,6.677
ISO_EN: R22.2 T4.5 U4.15 | length 5.9
  Top Layer w0.254: U4.15 8.952,10.813 9.363,10.402 10.645,10.402 ; v1(9.641,9.373) 10.645,10.377 10.645,10.402 ; T4.5 10.645,10.402
  Bottom Layer w0.254: R22.2 9.4,9.645 9.641,9.404 v1(9.641,9.373)
LED_SIG: R8.1 U4.12 | length 16.3
  Top Layer w0.254: v1@7.295,7.738 U4.12 ; v1(7.502,15.013) 8.077,15.013 12.002,18.938 R8.1
  Bottom Layer w0.254: v1(7.302,7.738) 7.302,14.747 7.502,14.947 v1(7.502,15.013)
NetC4_2: C4.2 R13.2 R14.1 U3.3 | length 4.9
  Top Layer w0.15: R13.2 15.982,10.841 16.83,9.993 U3.3
  Top Layer w0.5: R14.1 15.134,10.841 R13.2 C4.2
NetL1_DIN: L1.DIN R8.2 | length 1.6
  Top Layer w0.254: L1.DIN L1.DIN@11.002,21.998
  Top Layer w0.5: R8.2 L1.DIN@11.002,21.998
NetL1_DOUT: L1.DOUT L2.DIN | length 21.2
  Top Layer w0.254: v1(8.102,16.213) 8.102,23.014 8.419,23.331 L1.DOUT ; v1(8.28,4.592) 8.28,3.963 8.429,3.814 9.011,3.814 L2.DIN
  Bottom Layer w0.254: v1(8.102,16.213) 8.102,14.299 7.791,13.988 7.791,8.224 8.28,7.735 v1(8.28,4.592)
NetL3_1: L3.1 U3.1 | length 2.3
  Top Layer w0.254: U3.1 19.255,9.786 19.255,10.232 19.193,10.295 19.193,10.943 L3.1@19.255,11.006
NetR6_1: R6.1 U2.6 | length 1.8
  Bottom Layer w0.254: R6.1 U2.6
NetR7_1: R7.1 U2.8 | length 1.8
  Bottom Layer w0.254: R7.1 U2.8
NetR11_2: R11.2 R12.2 U1.4 | length 2.8
  Bottom Layer w0.254: R11.2 R12.2 10.518,10.069 10.518,9.607 10.94,9.185 U1.4
NetR15_2: R15.2 R16.1 U1.3 | length 4.3
  Bottom Layer w0.254: R15.2 9.234,4.233 9.234,5.12 R16.1 9.24,6.449 10.178,7.387 U1.3
STAT1: R21.1 U2.3 U4.10 | length 22.3
  Top Layer w0.254: U4.10 6.295,7.845 7.002,7.138 8.145,7.138 v4(9.231,8.224)
  GND w0.254: v4(9.231,8.224) 9.231,8.372 9.02,8.583 9.02,9.773 10.761,11.513 15.691,11.513 17.602,13.424 v1(17.602,15.063)
  Bottom Layer w0.254: R21.1 8.489,8.966 v4(9.231,8.224) ; U2.3 17.458,14.969 17.552,15.063 v1(17.602,15.063)
STAT2: U2.4
UPDI: U4.23 U5.1 | length 14.3
  Top Layer w0.254: v1(4.514,14.813) 5.295,14.033 U4.23
  Top Layer w0.5: v4(0.601,4.517) v6(1.76,5.204)
  Bottom Layer w0.254: v6@1.502,5.204 1.502,6.488 4.027,9.013 4.027,14.326 v1(4.514,14.813)
V_BAT: C1.2 C3.1 C7.1 H7.2 R9.1 R9.2 R11.1 R20.1 U1.2 U2.9 U2.10 U3.5 | length 20.8
  Bottom Layer w0.254: R11.1 R9.2 R9.2@12.406,11.404 ; U1.2 11.44,6.677 11.628,6.489 C3.1 11.664,6.403 12.787,6.403 13.469,7.085 16.189,7.085 16.323,7.219
  Bottom Layer w0.5: R9.1@13.506,11.404 13.506,11.304 13.606,11.304 14.054,10.856 C1.2 ; H7.2@15.02,0.108 14.733,0.395 14.733,1.049 14.63,1.151 14.63,5.526 16.189,7.085 ; R20.1 15.57,9.063 16.323,9.063 ; 16.323,7.219 16.323,9.063 ; 16.323,10.301 16.323,9.063
  other v7: 15.121,0.042
V_CH: D1.A R10.1 R15.1 R17.1 R17.2 R19.1 T1.1 T1.4 T2.1 T2.4 T3.1 T3.4 T4.1 | length 25.2
  Top Layer w0.254: T4.1 13.292,11.119 v1(13.292,5.882)
  Bottom Layer w0.15: R17.2@12.027,4.226 R17.2
  Bottom Layer w0.254: R15.1 R17.1@11.078,4.233 ; R17.2 12.615,4.226 13.292,4.904 v1(13.292,5.882)
  Bottom Layer w0.35: T1.1 4.18,18.507 4.53,18.156 5.447,18.156 5.652,18.361 D1.A 5.652,19.949 ; v1(5.413,20.182) 5.438,20.182 5.693,20.438 6.219,20.438 R10.1 6.314,20.533 6.314,21.402 R19.1@6.325,21.413 ; T2.1 12.278,22.434 12.278,22.144 12.483,21.939 13.295,21.939 v1(14.302,22.946) ; T2.4 13.371,25.365 v1(13.371,26.539) ; T3.4 13.923,15.663 13.718,15.458 13.718,15.114 13.955,14.877 v1(15.04,14.877) ; T3.1 v1(16.378,17.988)
  Bottom Layer w0.4: v1(1.338,20.563) 1.979,20.563 2.204,20.788 T1.4
VCC: C2.1 C6.1 D1.K L1.VDD L2.VDD R10.2 R21.2 R22.1 T4.4 U4.4 U5.2 | length 25
  Top Layer w0.254: v1(2.527,10.813) U4.4 ; v1(10.39,12.325) 10.39,12.259 10.229,12.098 10.229,11.537 T4.4
  Top Layer w0.5: v4(1.226,3.478) v6(2.395,4.104) ; U5.2@2.395,4.178 7.104,4.178 C6.1 7.152,2.878 7.53,2.5 L2.VDD ; L1.VDD 10.986,23.313 12.007,23.313 ; v1(12.027,21.358) 12.007,21.379 12.007,23.313 ; C2.1 12.007,23.313
  Bottom Layer w0.254: R21.2@8.494,11.446 R21.2 8.489,12.063 8.752,12.325 9.548,12.325 ; R22.1@9.395,11.446 R22.1 9.4,12.177 9.548,12.325 ; v1(10.39,12.325) 9.548,12.325
  Bottom Layer w0.35: R10.2 7.952,20.521 8.152,20.321 D1.K 8.093,18.795 8.093,18.17 7.806,17.883 7.53,17.883 v1(7.502,17.854)
  Bottom Layer w0.5: v4(1.226,3.478) v6(2.395,4.104)
VCC_ISO: C4.1 C5.1 L3.2 R13.1 T4.3 | length 0.1
  Top Layer w0.5: C4.1 C4.1@15.204,12.379
pads on no net: L2.DOUT T1.7 T1.8 T2.7 T2.8 T3.7 T3.8 T4.7 T4.8 U2.7 U4.1 U4.2 U4.5 U4.11 U4.13 U4.14 U4.16 U4.21 U4.24 U4.25
copper on no net:
  other v5: 5.495,10.513 6.595,10.513 5.495,11.613 6.595,11.613

## Polygon pours and split planes (outlines as drawn)
BUCK_EN on Bottom Layer "NONET_L-01_P-001" (solid, pour order 123): 11.827,8.444 12.524,8.437 12.642,8.437 12.64,8.117 13.29,8.104 13.281,8.113 13.349,8.374 13.082,8.374 12.501,9.136 11.827,9.136
BUCK_EN on Bottom Layer "NONET_L-01_P-001" (solid, pour order 125): 12.49,7.738 12.635,7.738 12.635,8.118 13.276,8.118 13.276,7.778 13.11,7.778 12.472,7.037 11.827,7.037 11.827,7.738
no net on Bottom Layer "NONET_L-01_P-001" (solid, pour order 124): 12.3,10.365
V_BAT on Bottom Layer "Bottom Layer-V_BAT" (solid, pour order 80): 16.31,11.277 17.085,11.277 17.135,11.227 17.135,10.402 17.035,10.302 16.732,9.999 15.914,9.999 15.182,9.999 14.905,9.956 14.905,11.19 15.434,11.19 15.782,11.277
GND on Bottom Layer "Bottom Layer-GND" (solid, pour order 102): 18.307,16.306 18.307,13.072 16.302,13.079 14.931,13.09 14.931,11.488 18.341,11.488 19.366,11.488 21.121,12.997 21.121,16.276 20.683,16.713 18.555,16.713
CH_VDD on Bottom Layer "Bottom Layer-CH_VDD" (solid, pour order 82): 16.096,15.876 16.18,15.96 16.577,15.96 16.652,15.885 16.877,15.313 17.127,14.726 17.127,13.301 17.102,13.276 16.377,13.276 15.893,13.492 14.927,13.492 14.927,14.16 16.327,14.145 16.327,15.038 16.096,15.238
VCC on VCC "VCC-No Net1" (solid, pour order 130): -6.061,14.502 cw(c-6.061,15.772) -7.331,15.772 -7.331,17.163 -7.331,18.555 cw(c-6.061,18.555) -6.061,19.825 -2.561,19.825 cw(c7.106,18.7) -0.849,24.307 -3.324,26.782 cw(c-2.426,27.68) -3.324,28.578 -2.339,29.562 -1.355,30.546 cw(c-0.457,29.648) 0.441,30.546 2.916,28.071 cw(c10.009,17.658) 7.379,29.98 7.379,33.48 cw(c8.649,33.48) 8.649,34.75 11.432,34.75 cw(c11.432,33.48) 12.702,33.48 12.702,29.98 cw(c10.073,17.658) 17.166,28.071 19.641,30.546 cw(c20.539,29.648) 21.437,30.546 22.421,29.562 23.405,28.578 cw(c22.507,27.68) 23.405,26.782 20.93,24.307 cw(c12.976,18.7) 22.643,19.825 22.642,19.825 26.142,19.825 cw(c26.142,18.555) 27.412,18.555 27.412,17.163 27.412,15.772 cw(c26.142,15.772) 26.142,14.502 22.642,14.502 cw(c-5.579,17.866) 12.629,-3.956 12.629,-7.456 cw(c11.359,-7.456) 11.359,-8.726 9.967,-8.726 8.576,-8.726 cw(c8.576,-7.456) 7.306,-7.456 7.306,-3.956 cw(c26.693,18.273) -2.561,14.502
V_CH on VCC "Top Layer-No Net" (solid, pour order 51): 0.355,19.838 cw(c10.603,18.19) 1.311,22.815 4.989,26.493 cw(c13.449,9.624) 8.525,27.843 13.305,27.843 cw(c8.827,14.372) 16.133,26.543 19.771,22.906 cw(c4.66,15.264) 21.025,19.614 cw(c0.738,17.341) 12.684,0.788 8.425,0.788 cw(c27.528,21.919) 6.46,2.747 6.46,3.821 6.73,4.109 7.067,4.106 9.763,10.36 13.766,10.36 14.352,10.625 14.352,14.334 14.352,19.039 13.716,19.039 13.499,19.023 13.061,19.138 13.015,23.619 9.651,23.602 4.669,18.804 cw(c559.257,2341.722)
V_BAT on Top Layer "NONET_L-01_P-001" (solid, pour order 126): 14.985,1.236 14.985,6.04 16.307,7.357 16.215,7.45 16.937,8.146 16.682,8.4 15.891,7.767 14.427,6.302 14.427,-0.372 14.569,-0.567 15.223,-0.474 15.543,-0.154 15.543,0.474
GND on Top Layer "Top Layer-GND 2" (solid, pour order 98): 18.49,8.201 18.082,8.609 17.772,8.918 17.88,9.026 18.439,9.585 18.439,9.656 18.174,9.921 18.104,9.921 17.671,9.488 17.436,9.254 16.928,9.762 16.778,9.762 15.965,10.575 15.859,10.575 14.656,9.373 14.656,9.303 15.045,8.914 15.222,8.914 15.797,9.488 16.05,9.488 17.338,8.201 16.636,7.499 16.636,7.429 16.742,7.323 16.742,7.258 16.071,6.586 16.616,6.04 18.439,6.04 18.761,6.494 18.563,7.871
VCC_ISO on Top Layer "Top Layer-VCC" (solid, pour order 92): 18.715,11.963 17.469,10.717 17.273,10.717 16.866,10.31 16.837,10.304 14.703,12.438 14.211,13.012 13.349,13.194 12.415,12.839 11.823,12.247 11.567,12.495 12.082,13.012 13.269,13.503 13.555,13.621 15.114,13.3 15.543,12.871 16.848,11.565 17.131,11.565 18.122,12.556
GND on GND "GND-No Net1" (solid, pour order 129): -6.061,14.502 cw(c-6.061,15.772) -7.331,15.772 -7.331,17.163 -7.331,18.555 cw(c-6.061,18.555) -6.061,19.825 -2.561,19.825 cw(c7.106,18.7) -0.849,24.307 -3.324,26.782 cw(c-2.426,27.68) -3.324,28.578 -2.339,29.562 -1.355,30.546 cw(c-0.457,29.648) 0.441,30.546 2.916,28.071 cw(c10.009,17.658) 7.379,29.98 7.379,33.48 cw(c8.649,33.48) 8.649,34.75 11.432,34.75 cw(c11.432,33.48) 12.702,33.48 12.702,29.98 cw(c10.073,17.658) 17.166,28.071 19.641,30.546 cw(c20.539,29.648) 21.437,30.546 22.421,29.562 23.405,28.578 cw(c22.507,27.68) 23.405,26.782 20.93,24.307 cw(c12.976,18.7) 22.643,19.825 22.642,19.825 26.142,19.825 cw(c26.142,18.555) 27.412,18.555 27.412,17.163 27.412,15.772 cw(c26.142,15.772) 26.142,14.502 22.642,14.502 cw(c-5.579,17.866) 12.629,-3.956 12.629,-7.456 cw(c11.359,-7.456) 11.359,-8.726 9.967,-8.726 8.576,-8.726 cw(c8.576,-7.456) 7.306,-7.456 7.306,-3.956 cw(c26.693,18.273) -2.561,14.502

## Keep-outs
VCC:
  lines w0.1: 12.835,0.897 11.5,0.65 11.502,0.662 9.451,0.758 7.437,1.507 6.298,2.747 6.342,3.932 6.577,4.178 7.104,4.178 9.793,10.492 14.059,10.492 14.189,10.623 14.189,18.876 14.352,19.039 13.061,19.138 13.015,23.619 9.651,23.602 4.669,18.804 0.187,19.877 0.47,20.788 1.124,22.611 2.394,24.149 4.916,26.639 8.072,28.046 13.356,27.997 16.248,26.657 19.696,23.078 20.163,22.379 21.133,19.331 cw(c0.138,17.598) 13.048,0.951 ; 20.691,12.912 cw(c20.733,12.912) 20.733,12.954

## Silkscreen, mask and mechanical layers (free items; w line width, h text height)
Top Overlay:
  lines w0.2: -7.15,17.778 -6.6,17.778 ; -4.297,17.923 -1.258,18.39 -1.25,18.4 ; -4.292,16.748 -1.258,16.028 ; -2.146,19.138 -1.596,19.138 ; -1.743,29.423 -1.336,29.83 ; -0.694,26.871 0.9,24.4 ; 0.271,27.937 2.821,26.338 ; 2.967,26.93 3.374,27.337 ; 4.886,1.56 5.436,1.56 ; 7.655,-3.161 8.23,-3.161 ; 8.74,-2.8 9.254,-5.615 ; 8.815,28.855 9.5,31.675 ; 9.094,-8.247 9.669,-8.247 ; 10.513,34.25 11.088,34.25 ; 10.645,31.675 10.65,31.675 11.34,28.855 ; 10.67,-5.641 11.312,-2.8 ; 12.091,29.29 12.666,29.29 ; 14.078,8.536 15.096,8.536 15.93,9.37 ; 17.283,26.405 19.754,27.999 ; 19.221,24.484 20.82,27.034 ; 19.813,24.338 20.22,23.931 ; 21.449,15.772 24.447,16.49 ; 21.449,18.555 24.432,17.884 ; 21.778,15.136 22.285,15.136 ; 22.306,29.048 22.713,28.641 ; 26.689,16.588 27.239,16.588
  text "+" at 9.195,33.85 h0.8
  text "+" at 21.193,29.558 h0.8 r315
  text "+" at 7.82,28.812 h0.8
  text "+" at -2.281,28.342 h0.8 r45
  text "+" at 16.645,27.128 h0.8 r315
  text "+" at 0.177,23.761 h0.8 r45
  text "+" at 21.56,18.938 h0.8
  text "+" at 27.181,18.106 h0.8 r180
  text "+" at -7.092,16.261 h0.8
  text "+" at -2.214,14.969 h0.8
  text "v4.3" at -1.021,10.047 h0.8 r293.44
  text "D" at 2.496,5.623 h0.8
  text "+" at 3.146,4.398 h0.8
  text "-" at 4.021,2.948 h0.8
  text "+" at 15.062,1.4 h0.8
  text "+" at 11.939,-3.436 h0.8
  text "+" at 10.475,-8.625 h0.8
Bottom Overlay:
  lines w0.2: -7.121,17.786 -6.546,17.786 ; -2.308,15.813 -1.708,15.813 ; -2.295,18.692 -1.695,18.692 ; -2.008,15.513 -2.008,16.113 ; -1.738,29.424 -1.331,29.831 ; 0.1,24.824 0.7,24.824 ; 0.4,24.524 0.4,25.124 ; 2.042,26.766 2.642,26.766 ; 3.047,4.706 3.647,4.706 ; 3.347,4.406 3.347,5.006 ; 3.908,3.341 4.508,3.341 ; 4.865,1.544 5.465,1.544 ; 8.392,29.5 8.992,29.5 ; 8.405,-3.436 8.98,-3.436 ; 8.692,29.2 8.692,29.8 ; 9.116,-8.249 9.691,-8.249 ; 10.539,34.253 11.114,34.253 ; 11.143,29.5 11.743,29.5 ; 17.581,26.631 18.181,26.631 ; 17.881,26.331 17.881,26.931 ; 19.508,24.521 20.108,24.521 ; 21.775,18.553 22.375,18.553 ; 21.779,15.738 22.379,15.738 ; 22.075,18.253 22.075,18.853 ; 22.284,29.057 22.691,28.651 ; 26.621,16.564 27.196,16.564
  text "+" at 9.733,34.631 h0.8 r180
  text "+" at 21.171,29.568 h0.8 r315
  text "+" at -2.276,28.344 h0.8 r45
  text "+" at 27.309,17.384 h0.8 r90
  text "+" at -7.234,16.966 h0.8 r270
  text "D" at 2.981,5.562 h0.8
  text "+" at 15.028,1.4 h0.8
  text "+" at 11.232,-3.046 h0.8 r180
  text "+" at 10.497,-8.628 h0.8
Mechanical 2:
  lines w0.15: -7.22,17.163 10.041,17.163 ; -4.49,31.694 10.041,17.163 ; -3.212,15.924 -3.212,17.924 ; -2.013,19.722 -2.925,19.722 ccw(c-2.925,18.452) -4.195,18.452 -4.195,15.492 ccw(c-2.925,15.492) -2.925,14.222 -1.999,14.222 ; -1.395,15.922 -1.395,17.922 ; -0.828,26.6 0.586,28.014 ; -0.524,23.799 -1.875,25.15 cw(c-0.977,26.048) -1.875,26.946 0.218,29.039 cw(c1.116,28.141) 2.014,29.039 3.296,27.757 ; 0.455,25.313 1.869,26.728 ; 7.295,-1.407 7.295,-5.487 7.302,-5.487 7.302,-6.117 ccw(c8.572,-6.117) 8.572,-7.387 11.532,-7.387 ccw(c11.532,-6.117) 12.802,-6.117 12.802,-5.487 12.802,-1.487 ; 7.379,29.48 7.379,31.643 cw(c8.649,31.643) 8.649,32.913 11.609,32.913 cw(c11.609,31.643) 12.879,31.643 12.879,29.42 ; 9.05,-6.404 11.05,-6.404 ; 9.052,-4.587 11.052,-4.587 ; 9.063,30.096 11.063,30.096 ; 9.065,31.913 11.065,31.913 ; 10.041,-8.635 10.041,17.163 ; 10.041,17.19 22.331,29.48 ; 10.041,34.874 10.041,17.163 ; 16.941,27.711 19.074,29.844 cw(c19.972,28.946) 20.87,29.844 22.963,27.751 cw(c22.065,26.852) 22.963,25.954 20.719,23.662 ; 19.26,27.506 20.674,26.092 ; 20.546,28.79 21.961,27.375 ; 22.116,14.208 26.035,14.208 ccw(c26.035,15.478) 27.305,15.478 27.305,18.438 ccw(c26.035,18.438) 26.035,19.708 22.164,19.708 ; 24.488,15.916 24.488,17.916 ; 26.305,15.913 26.305,17.913 ; 28.43,17.163 10.041,17.163
  lines w0.158: -3.212,15.924 ccw(c-2.303,16.033) -1.395,15.922 ; -3.212,17.924 cw(c-2.304,17.813) -1.395,17.922 ; -2.013,19.722 cw(c9.178,17.946) -0.524,23.799 ; -1.999,14.208 ccw(c22.562,18.295) 7.311,-1.386 ; -0.828,26.6 ccw(c-0.109,26.034) 0.455,25.313 ; 0.586,28.014 cw(c1.15,27.293) 1.869,26.728 ; 3.296,27.757 cw(c10.362,16.715) 7.379,29.48 ; 9.05,-6.404 cw(c9.161,-5.495) 9.052,-4.587 ; 9.063,30.096 cw(c9.174,31.005) 9.065,31.913 ; 11.05,-6.404 ccw(c10.941,-5.495) 11.052,-4.587 ; 11.063,30.096 ccw(c10.954,31.005) 11.065,31.913 ; 12.766,-1.44 ccw(c-2.416,18.295) 22.145,14.203 ; 12.879,29.42 cw(c10.25,17.488) 16.941,27.711 ; 19.26,27.506 cw(c19.981,28.07) 20.546,28.79 ; 20.674,26.092 ccw(c21.24,26.811) 21.961,27.375 ; 20.719,23.662 cw(c10.88,17.824) 22.164,19.708 ; 24.488,15.916 ccw(c25.397,16.024) 26.305,15.913 ; 24.488,17.916 cw(c25.396,17.805) 26.305,17.913
Mechanical 3:
  lines w0.15: -6.331,16.437 -6.331,17.163 -6.331,17.889 ; -4.513,16.437 -4.513,17.163 -4.513,17.889 ; -2.561,14.502 -6.061,14.502 cw(c-6.061,15.772) -7.331,15.772 -7.331,17.163 -7.331,18.555 cw(c-6.061,18.555) -6.061,19.825 -2.561,19.825 ; -2.146,28.342 -1.632,28.855 -1.119,29.368 ; -0.861,27.057 -0.347,27.57 0.166,28.083 ; -0.849,24.307 -3.324,26.782 cw(c-2.426,27.68) -3.324,28.578 -2.339,29.562 -1.355,30.546 cw(c-0.457,29.648) 0.441,30.546 2.916,28.071 ; 7.306,-3.956 7.306,-7.456 ccw(c8.576,-7.456) 8.576,-8.726 9.967,-8.726 11.359,-8.726 ccw(c11.359,-7.456) 12.629,-7.456 12.629,-3.956 ; 7.379,29.98 7.379,33.48 cw(c8.649,33.48) 8.649,34.75 10.041,34.75 11.432,34.75 cw(c11.432,33.48) 12.702,33.48 12.702,29.98 ; 9.241,-7.726 9.967,-7.726 10.693,-7.726 ; 9.241,-5.908 9.967,-5.908 10.693,-5.908 ; 9.315,31.933 10.041,31.933 10.767,31.933 ; 9.315,33.75 10.041,33.75 10.767,33.75 ; 10.041,17.19 10.041,17.163 ; 10.061,17.163 10.041,17.163 ; 10.062,17.163 10.041,17.163 ; 17.166,28.071 19.641,30.546 cw(c20.539,29.648) 21.437,30.546 22.421,29.562 23.405,28.578 cw(c22.507,27.68) 23.405,26.782 20.93,24.307 ; 19.916,28.083 20.429,27.57 20.942,27.057 ; 21.201,29.368 21.714,28.855 22.227,28.342 ; 22.642,14.502 26.142,14.502 ccw(c26.142,15.772) 27.412,15.772 27.412,17.163 27.412,18.555 ccw(c26.142,18.555) 26.142,19.825 22.642,19.825 ; 24.595,16.437 24.595,17.163 24.595,17.889 ; 26.412,16.437 26.412,17.163 26.412,17.889
  lines w0.158: -6.331,16.44 ccw(c-5.422,16.548) -4.513,16.437 ; -6.331,17.887 cw(c-5.422,17.778) -4.513,17.889 ; -2.561,14.502 ccw(c26.693,18.273) 7.306,-3.956 ; -2.561,19.825 cw(c7.106,18.7) -0.849,24.307 ; -2.146,28.342 ccw(c-1.425,27.778) -0.859,27.058 ; -1.119,29.368 cw(c-0.555,28.647) 0.165,28.082 ; 2.916,28.071 cw(c10.009,17.658) 7.379,29.98 ; 9.241,-5.908 ccw(c9.352,-6.817) 9.243,-7.726 ; 9.315,31.933 cw(c9.426,32.841) 9.317,33.75 ; 10.691,-7.726 ccw(c10.582,-6.817) 10.693,-5.908 ; 10.765,33.75 cw(c10.656,32.841) 10.767,31.933 ; 12.629,-3.956 ccw(c-5.579,17.866) 22.642,14.502 ; 12.702,29.98 cw(c10.073,17.658) 17.166,28.071 ; 19.917,28.082 cw(c20.637,28.647) 21.201,29.368 ; 20.93,24.307 cw(c12.976,18.7) 22.643,19.825 ; 20.941,27.058 ccw(c21.506,27.778) 22.227,28.342 ; 24.595,16.437 ccw(c25.503,16.548) 26.412,16.44 ; 24.595,17.889 cw(c25.503,17.778) 26.412,17.887